# Altium PCB Karduino_PCB.pcbdoc
Units mil, origin at the board's own origin, x right, y up, seen from the top; angles counter-clockwise.
Board outline 4499.99 x 4624.99 mil, 2 copper layers (Top Layer, Bottom Layer); 38 components, 35 nets, 191 pads, 0 vias.
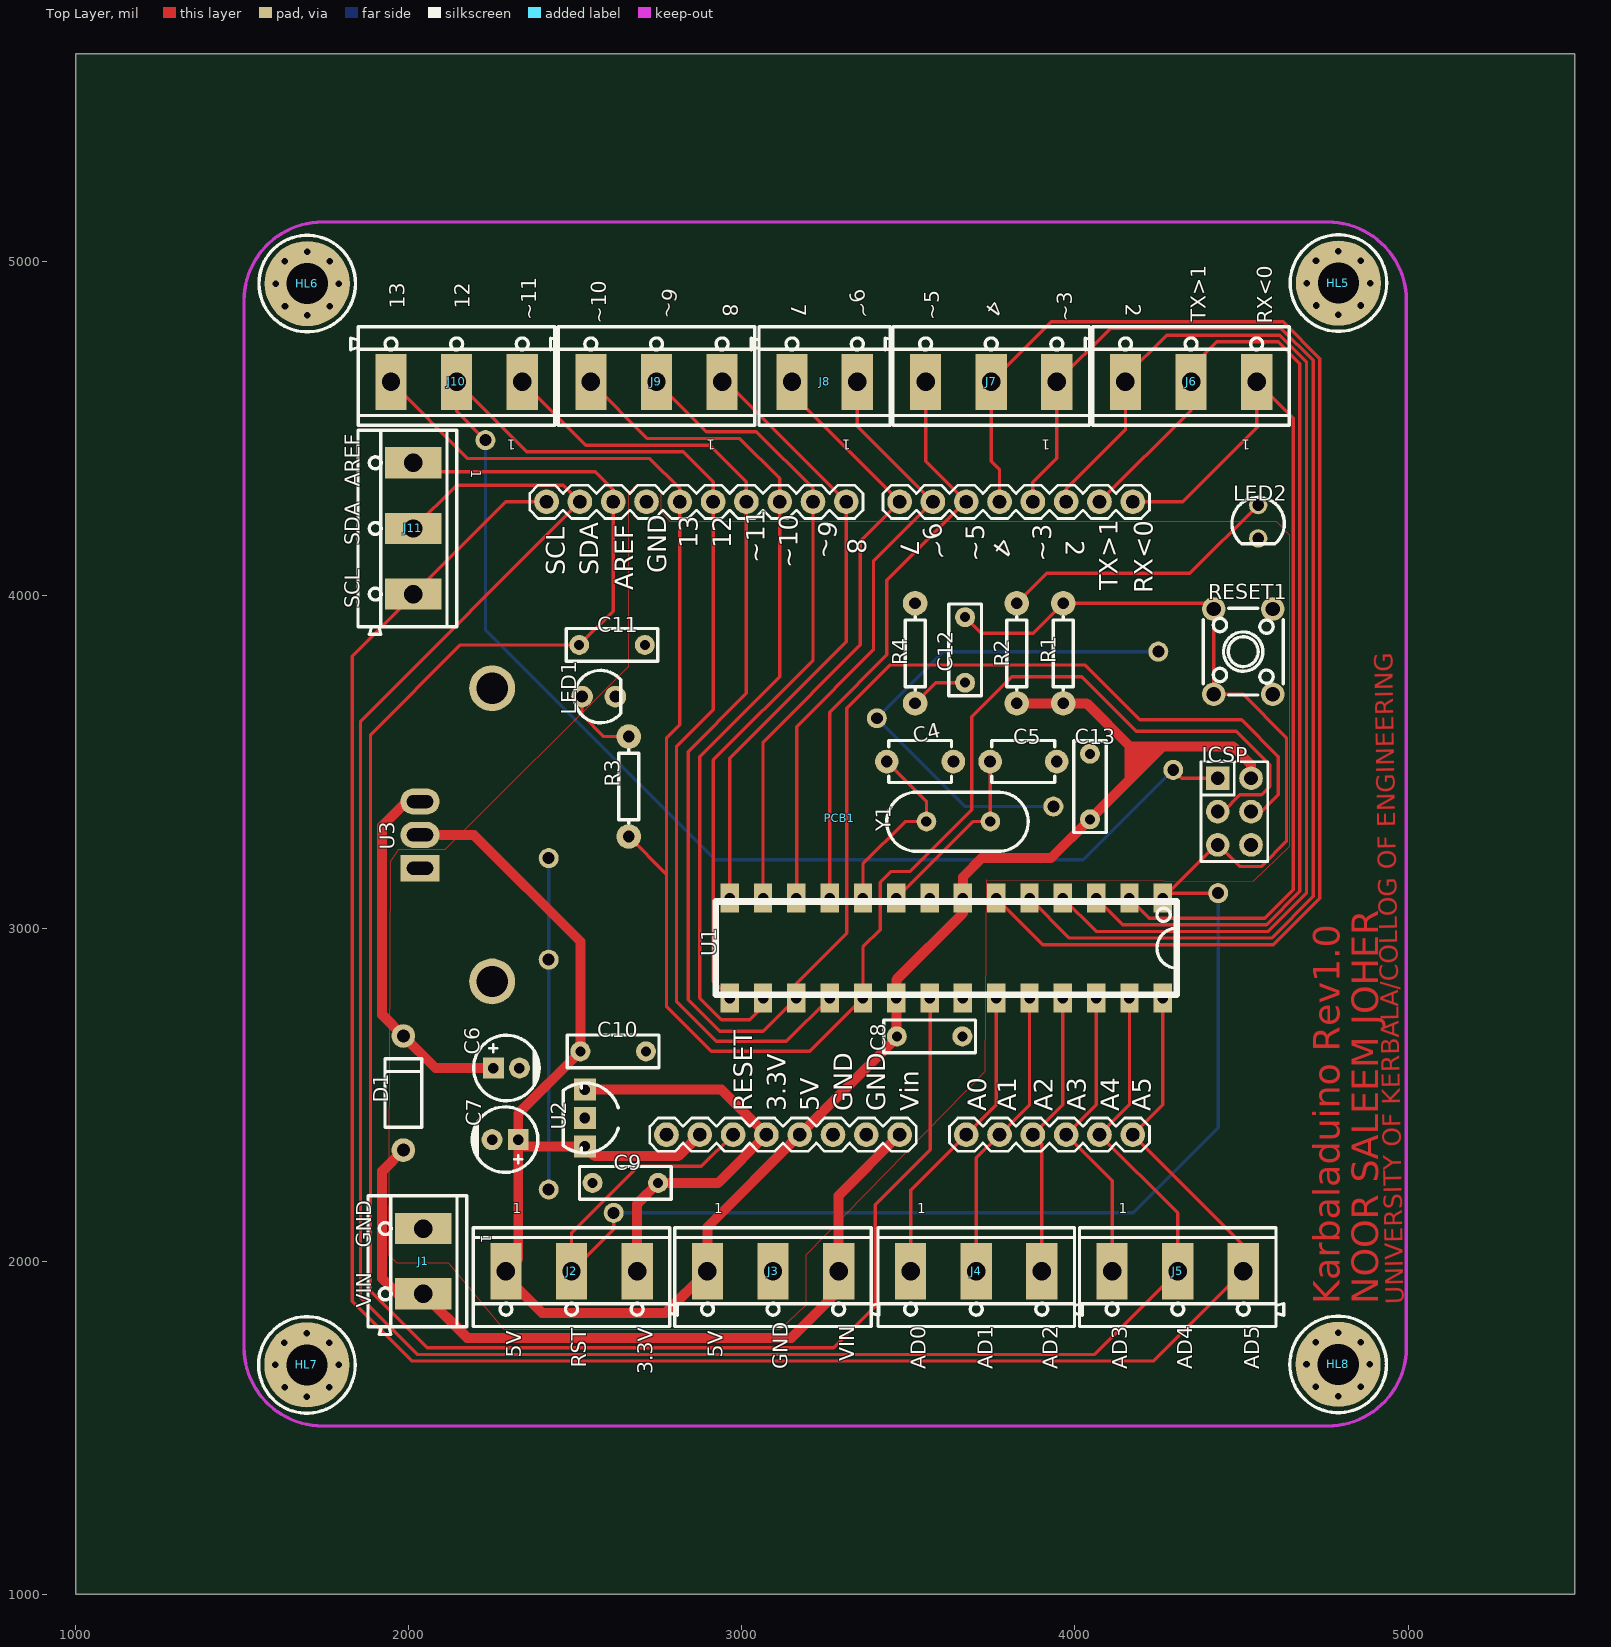
[diagram p0: Top Layer view]
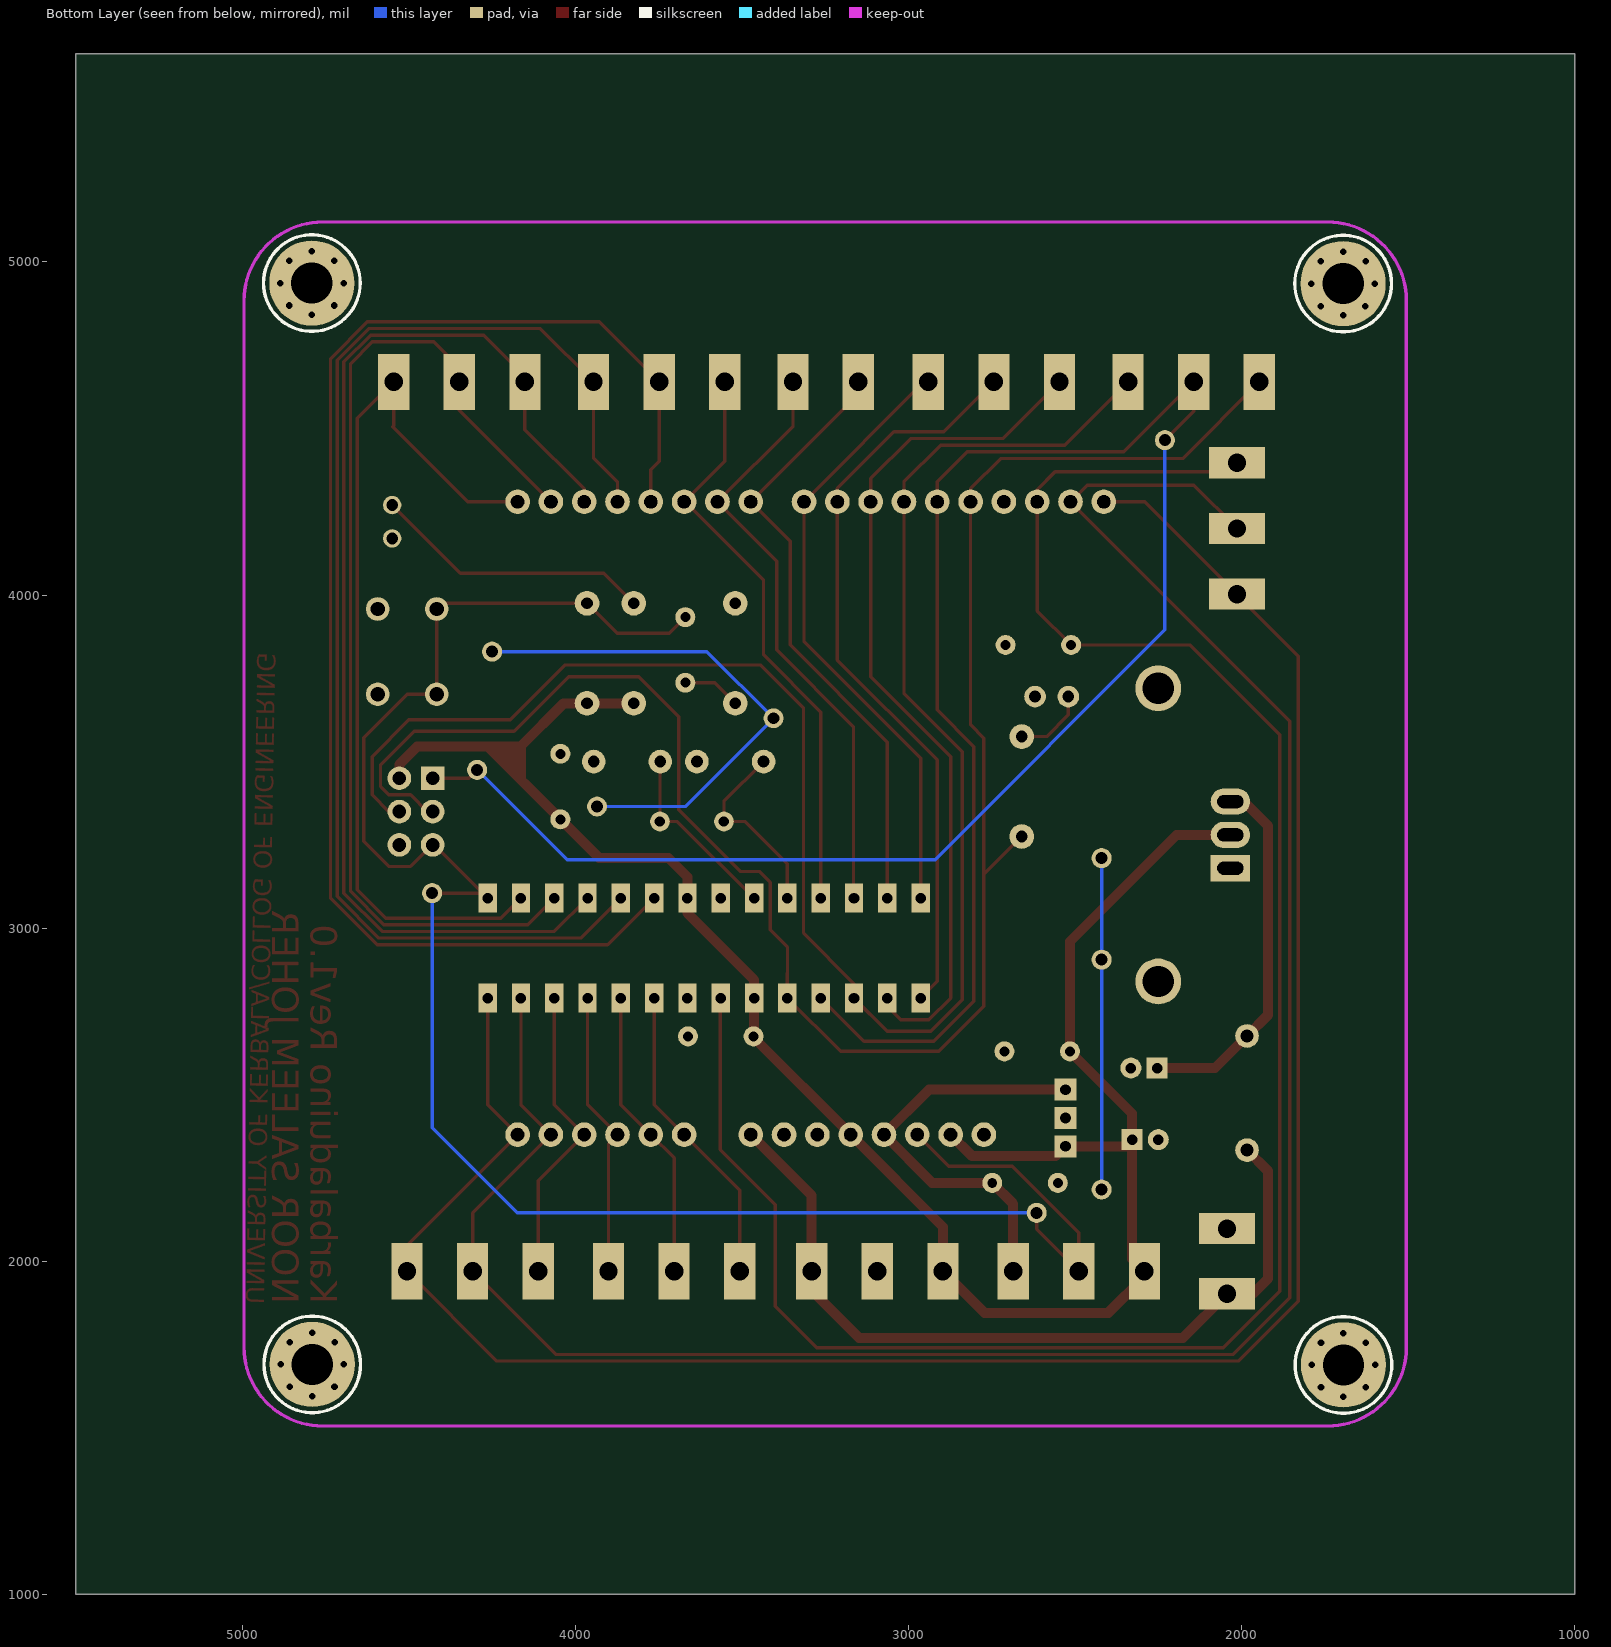
[diagram p1: Bottom Layer view, seen from below]

## Layer stack, top to bottom
Top Layer: signal copper (thickness not stored)
Dielectric: dielectric 12.6, FR-4, Dk 4.8
Bottom Layer: signal copper (thickness not stored)

## Board outline
5499.99,1000 1000,1000 1000,5624.99 5499.99,5624.99

## Components (designator, comment, footprint, x,y, rotation, side; value= is the part's Value field where it differs from the comment)
C4 "22pF" CAP-TH_L4.8-W3.2-P5.08-D0.5 3535.01,3500 r0 top
C5 "22pF" CAP-TH_L4.8-W3.2-P5.08-D0.5 3845.01,3500 r0 top
C6 "47uF" PKG-ELE-CAP-D5.0XH11.0XF2.0-VERT 2253.48,2579.84 r0 top
C7 "47uF" PKG-ELE-CAP-D5.0XH11.0XF2.0-VERT 2328.48,2364.84 r180 top
C8 "100nF" "100NF, 63V CAPACITOR" 3563.48,2674.84 r270 top
C9 "100nF" "100NF, 63V CAPACITOR" 2650.01,2235 r90 top
C10 "100nF" "100NF, 63V CAPACITOR" 2613.48,2629.84 r270 top
C11 "100nF" "100NF, 63V CAPACITOR" 2610.01,3850 r270 top
C12 "100nF" "100NF, 63V CAPACITOR" 3670.01,3835 r180 top
C13 "100nF" "100NF, 63V CAPACITOR" 4045.01,3425 r0 top
D1 "1N4007G-T" DO-41_BD2.4-L4.7-P8.70-D0.9-RD 1983.48,2504.84 r270 top
HL5 "M3 STUD" "M3 STUD" 4791.06,4936.53 r0 top
HL6 "M3 STUD" "M3 STUD" 1695.01,4935 r0 top
HL7 "M3 STUD" "M3 STUD" 1693.96,1688.47 r0 top
HL8 "M3 STUD" "M3 STUD" 4790.01,1690 r0 top
ICSP "ICSP" HDR-TH_6P-P2.54-V-M-R2-C3-S2.54-1 4478.51,3349.8 r270 top
J1 "CON_TERMINAL_BLOCK_02-5MM" TERMINAL_BLOCK_2P_5 2043.48,1999.84 r90 top
J2 "CON_TERMINAL_BLOCK_03-5MM" TERMINAL_BLOCK_3P_5 2488.48,1969.84 r180 top
J3 "CON_TERMINAL_BLOCK_03-5MM" TERMINAL_BLOCK_3P_5 3093.48,1969.84 r180 top
J4 "CON_TERMINAL_BLOCK_03-5MM" TERMINAL_BLOCK_3P_5 3703.48,1969.84 r180 top
J5 "CON_TERMINAL_BLOCK_03-5MM" TERMINAL_BLOCK_3P_5 4308.48,1969.84 r180 top
J6 "CON_TERMINAL_BLOCK_03-5MM" TERMINAL_BLOCK_3P_5 4348.48,4639.84 r0 top
J7 "CON_TERMINAL_BLOCK_03-5MM" TERMINAL_BLOCK_3P_5 3748.48,4639.84 r0 top
J8 "CON_TERMINAL_BLOCK_02-5MM" TERMINAL_BLOCK_2P_5 3248.48,4639.84 r0 top
J9 "CON_TERMINAL_BLOCK_03-5MM" TERMINAL_BLOCK_3P_5 2743.48,4639.84 r0 top
J10 "CON_TERMINAL_BLOCK_03-5MM" TERMINAL_BLOCK_3P_5 2143.51,4639.8 r0 top
J11 "CON_TERMINAL_BLOCK_03-5MM" TERMINAL_BLOCK_3P_5 2013.51,4199.8 r90 top
LED1 "LED-TH-3mm_G" LED-TH_BD3.0_GREEN 2570.01,3695 r90 top
LED2 "LED-TH-3mm_R" LED-TH_BD3.0_RED 4550.01,4220 r0 top
PCB1 "ARDUINO UNO SHIELD" E14_ARDUINO_SHIELD_PINOUT 3293.48,3329.84 r0 top
R1 "10k" R_AXIAL-0.3 3965.01,3825 r90 top
R2 "1K" R_AXIAL-0.3 3825.01,3825 r270 top
R3 "1K" R_AXIAL-0.3 2660.01,3425 r90 top
R4 "1K" R_AXIAL-0.3 3520.01,3825 r270 top
RESET1 "K4-6×6_TH" KEY-TH_4P-L6.0-W6.0-P4.50-LS6.5 4505.01,3830 r270 top
U1 "ATmega328-PU" DIP28 3613.48,2939.84 r180 top
U2 "LE33CZ" TO92-INLINE 2528.48,2429.84 r270 top
Y1 "16.000" CRYSTAL-TH_L10.8-W4.5-P4.88 3650.01,3320 r0 top

## Footprints (in the part's own frame and the unit in brackets; to place one, negate y for a bottom-side part, rotate by r counter-clockwise, add the part's x,y. Pads: shape width x height; smd on the part's side, far side on the other; paste and mask are expansions set on the pad)
"100NF, 63V CAPACITOR" [mil]
  round 60 hole 30 paste+0 mask+2: 1(0,98.4) 2(0,-98.4)
  silkscreen extent -49,-138 49,138
CAP-TH_L4.8-W3.2-P5.08-D0.5 [mm]
  round 1.8 hole 0.9 paste+0 mask+0.051: 1(-2.54,0) 2(2.54,0)
  silkscreen extent -2.4,-1.6 2.4,1.6
CRYSTAL-TH_L10.8-W4.5-P4.88 [mm]
  round 1.5 hole 0.8 paste+0 mask+0.051: 1(-2.44,0) 2(2.44,0)
  silkscreen extent -5.46,-2.28 5.32,2.24
DIP28 [mil]
  rect 55.1x86.6 hole 31.6 paste+0 mask+2: 1(-650,-150) 2(-550,-150) 3(-450,-150) 4(-350,-150) 5(-250,-150) 6(-150,-150) 7(-50,-150) 8(50,-150) 9(150,-150) 10(250,-150) 11(350,-150) 12(450,-150) 13(550,-150) 14(650,-150) 15(650,150) 16(550,150) 17(450,150) 18(350,150) 19(250,150) 20(150,150) 21(50,150) 22(-50,150) 23(-150,150) 24(-250,150) 25(-350,150) 26(-450,150) 27(-550,150) 28(-650,150)
  silkscreen extent -692,-140 692,140
DO-41_BD2.4-L4.7-P8.70-D0.9-RD [mm]
  round 1.8 hole 1 paste+0 mask+0.051: 1(-4.35,0) 2(4.35,0)
  silkscreen extent -2.6,-1.4 2.6,1.4
E14_ARDUINO_SHIELD_PINOUT [mil]
  round 74 hole 40 slot 40.2 at 90 deg paste+0 mask+2: 0(880,950) 1(780,950) 2(680,950) 3(580,950) 3.3V(-220,-950) 4(480,950) 5(380,950) 5V(-120,-950) 6(280,950) 7(180,950) 8(20,950) 9(-80,950) 10(-180,950) 11(-280,950) 12(-380,950) 13(-480,950) A0(380,-950) A1(480,-950) A2(580,-950) A3(680,-950) A4(780,-950) A5(880,-950) AREF(-680,950) GND(-580,950) GND.(80,-950) GND..(-20,-950) I/OREF(-420,-950) N/C(-520,-950) RESET(-320,-950) SCL(-880,950) SDA(-780,950) VIN(180,-950)
  silkscreen extent -930,-1000 930,1000
HDR-TH_6P-P2.54-V-M-R2-C3-S2.54-1 [mm]
  rect 1.8x1.8 hole 1.05 paste+0 mask+0.051: 1(-2.54,-1.27)
  round 1.8 hole 1.05 paste+0 mask+0.051: 2(-2.54,1.27) 3(0,-1.27) 4(0,1.27) 5(2.54,-1.27) 6(2.54,1.27)
  silkscreen extent -3.81,-2.54 3.81,2.54
KEY-TH_4P-L6.0-W6.0-P4.50-LS6.5 [mm]
  round 1.8 hole 1.1 paste+0 mask+0.051: 1(-3.251,-2.25) 2(3.251,-2.25) 3(3.251,2.25) 4(-3.251,2.25)
  silkscreen extent -3.3,-3.05 3.3,3.05
LED-TH_BD3.0_GREEN [mil]
  round 65 hole 35.43 paste+0 mask+2: 1(0,50) 2(0,-50)
  silkscreen extent -79,-66 79,73
LED-TH_BD3.0_RED [mm]
  round 1.4 hole 0.9 paste+0 mask+0.051: 1(0,1.27) 2(0,-1.27)
  silkscreen extent -2,-1.69 2,1.87
"M3 STUD" [mm]
  round 0.7 hole 0.5 paste+0: 1(-2.413,0) 1(-1.712,1.696) 1(-1.696,-1.712) 1(0,-2.413) 1(0,2.413) 1(1.712,-1.712) 1(1.712,1.696) 1(2.413,0)
  round 6.5 hole 3.15 paste+0 mask+0.102: 1(0,0)
  silkscreen extent -3.68,-3.68 3.68,3.68
PKG-ELE-CAP-D5.0XH11.0XF2.0-VERT [mm]
  rect 1.6x1.6 hole 0.8 paste+0 mask+0.102: 1(0,0)
  round 1.6 hole 0.8 paste+0 mask+0.102: 2(2,0)
  silkscreen extent -1.49,-2.5 3.51,2.5
R_AXIAL-0.3 [mil]
  round 74 hole 35.4 paste+0 mask+2: 1(-150,0) 2(150,0)
  silkscreen extent -110,-30 110,30
TERMINAL_BLOCK_2P_5 [mil]
  rect 93.7x168.7 hole 55.2 paste+0 mask+2: 1(98,0) 2(-98,0)
  silkscreen extent -220,-130 197,166
TERMINAL_BLOCK_3P_5 [mm]
  rect 2.38x4.285 hole 1.402 paste+0 mask+0.051: 1(5.004,0) 2(0,0) 3(-5.004,0)
  silkscreen extent -8.08,-3.3 7.49,4.22
TO92-INLINE [mil]
  rect 66x66 hole 32 paste+0 mask+2: 1(-85,0) 2(0,0) 3(85,0)
  silkscreen extent -105,-65 105,100

## Free pads (board coordinates)
  rect 118.11x78.74 hole 39.37 slot 78.74 at 0 deg paste+0 mask+2: 1(2033.47,3179.84)
  oval 118.11x78.74 hole 39.37 slot 78.74 at 0 deg paste+0 mask+2: 2(2033.47,3279.84) 3(2033.47,3379.84)
  round 137.79 hole 94.09 paste+0 mask+2: 4(2250.01,2839.68) 4(2250.01,3720)
  round 60 hole 36 paste+0 mask+2: 5(4430.01,3105) 6(2615.01,2145) 7(4295.01,3475) 8(2230.01,4465) 9(4250.01,3830) 10(3405.01,3630) 12(2420.01,3210) 13(2420.01,2905) 14(2420.01,2215) 16(3935.01,3365)

## Nets (pads, with @x,y where several pads share a name; then routed paths per layer and width w, separated by ;. In a path a pad name is that pad's centre, name@x,y a point inside that pad or via, vN(x,y) a via of type N, cw(c..) or ccw(c..) an arc to the next point about the centre after c; other vN are vias at no path point)
+3.3V: C9.2 J2.3 PCB1.3.3V U2.1 | length 1277.2
  Top Layer w30: U2.1 2938.48,2514.84 PCB1.3.3V 2928.64,2235 C9.2 2685.48,2172.07 J2.3
+5V: C7.1 C8.2 C10.2 C13.2 ICSP.2 J2.1 J3.1 pad.2 PCB1.5V PCB1.I/OREF R1.1 R2.2 U1.7 U1.20 U2.3 | length 7292.4
  Top Layer w10: J3.1 2896.47,2102.84 PCB1.5V 3465.08,2671.44 C8.2
  Top Layer w30: pad.2 2195.17,3279.84 2515.08,2959.93 C10.2 2328.48,2443.24 C7.1 ; J2.1 2328.48,2006.84 C7.1 ; J2.1 2291.51,1953.5 2400.01,1845 2771.61,1845 J3.1 ; U2.3 2558.31,2315 2808.61,2315 PCB1.I/OREF ; U2.3 2348.48,2344.84 C7.1 ; J3.1 2896.47,2102.84 PCB1.5V 3465.08,2671.44 C8.2 3463.48,2676.44 U1.20 3463.48,2844.84 3663.48,3044.84 U1.7 ; U1.7 3663.51,3153.5 3720.01,3210 3928.41,3210 ; R2.2 R1.1 4035.01,3675 4165.01,3545 4263.41,3545 ; 3922.11,3210 3928.41,3210 ; 4163.5,3480.94 4227.55,3545 4244.06,3545 ; 4163.61,3445.2 4163.31,3545 4195.71,3513.1 ; ICSP.2 4528.51,3491.5 4475.01,3545 4263.41,3545 ; 3928.41,3210 C13.2 4263.41,3545
AD0: J4.1 PCB1.A0 U1.23 | length 926.5
  Top Layer w10: J4.1 3506.47,2212.84 PCB1.A0 3763.48,2469.84 U1.23
AD1: J4.2 PCB1.A1 U1.24 | length 886.3
  Top Layer w10: J4.2 3703.48,2309.84 PCB1.A1 3863.48,2469.84 U1.24
AD2: J4.3 PCB1.A2 U1.25 | length 868.5
  Top Layer w10: J4.3 3900.48,2352.84 PCB1.A2 3963.48,2469.84 U1.25
AD3: J5.1 PCB1.A3 U1.26 | length 914.4
  Top Layer w10: U1.26 4063.48,2469.84 PCB1.A3 4111.47,2241.84 J5.1
AD4/SDA: J5.2 J11.2 PCB1.A4 PCB1.SDA U1.27 | length 6819.3
  Top Layer w10: J11.2 2143.61,4330 2463.31,4330 PCB1.SDA 1855.01,3621.4 1855.01,1890 2025.01,1720 4058.61,1720 J5.2 ; U1.27 4163.48,2469.84 PCB1.A4 4308.48,2144.84 J5.2
AD5/SCL: J5.3 J11.3 PCB1.A5 PCB1.SCL U1.28 | length 6570.2
  Top Layer w10: J11.3 2013.51,3999.8 1830.01,3816.4 1830.01,1880 2010.01,1700 4235.61,1700 J5.3 ; J11.3 2290.48,4279.84 PCB1.SCL ; U1.28 4263.48,2469.84 PCB1.A5 4505.48,2047.84 J5.3
AREF: C11.2 J11.1 PCB1.AREF U1.21 | length 6181.4
  Top Layer w10: J11.1 2040.31,4370 2560.01,4370 2613.51,4316.5 PCB1.AREF ; PCB1.AREF 2613.48,3951.87 C11.2 2155.01,3850 1885.01,3580 1885.01,1910 2035.01,1760 2055.01,1740 3275.01,1740 3400.01,1865 3400.01,2170 3565.01,2335 3565.01,2788.3 U1.21
DTR: C12.1 R4.2 | length 175.5
  Top Layer w10: R4.2 3581.61,3736.6 C12.1
GND: C4.2 C5.2 C6.2 C7.2 C8.1 C9.1 C10.1 C11.1 C13.1 ICSP.6 J1.1 J3.2 LED1.2 LED2.2 pad.1 pad.9 pad.10 pad.12 pad.13 pad.14 pad.16 PCB1.GND PCB1.GND. PCB1.GND.. R4.1 RESET1.3 RESET1.4 U1.8 U1.22 U2.2 | length 2562.6
  Bottom Layer w10: pad.14 pad.13 pad.12 ; pad.16 3670.01,3365 pad.10 3605.01,3830 pad.9
IO0: J6.1 PCB1.0 U1.2 | length 2726.1
  Top Layer w10: U1.2 4223.31,3030 4570.01,3030 4655.01,3115 4655.01,3695 4655.01,4530.3 J6.1 ; PCB1.0 4323.48,4279.84 4548.48,4504.84 4545.48,4507.84 J6.1
IO1: J6.2 PCB1.1 U1.3 | length 3173.7
  Top Layer w10: U1.3 4143.32,3010 4575.01,3010 4675.01,3110 4675.01,4695 4610.01,4760 4425.01,4760 4348.48,4683.47 J6.2 4348.48,4554.84 PCB1.1
IO2: J6.3 PCB1.2 U1.4 | length 3493.7
  Top Layer w10: U1.4 4063.32,2990 4580.01,2990 4695.01,3105 4695.01,4700 4615.01,4780 4275.01,4780 4151.48,4656.47 J6.3 ; PCB1.2 3973.51,4318.5 4151.51,4496.5 J6.3
IO3: J7.1 PCB1.3 U1.5 | length 3828
  Top Layer w10: U1.5 3983.32,2970 4590.01,2970 4715.01,3095 4715.01,4705 4620.01,4800 4105.64,4800 J7.1 ; PCB1.3 3873.51,4338.5 3945.51,4410.5 J7.1
IO4: J7.2 PCB1.4 U1.6 | length 4184.5
  Top Layer w10: J7.2 3748.51,4401.5 3773.51,4376.5 PCB1.4 ; J7.2 3928.64,4820 4625.01,4820 4735.01,4710 4735.01,3090 4595.01,2950 3903.32,2950 U1.6
IO5: J7.3 PCB1.5 U1.11 | length 1772.5
  Top Layer w10: U1.11 3263.51,3648.5 3435.01,3820 3435.01,4045 3669.81,4279.8 PCB1.5 ; J7.3 3551.47,4401.84 PCB1.5
IO6: J8.1 PCB1.6 U1.12 | length 1813.9
  Top Layer w10: U1.12 3165.01,3091.4 3165.01,3605 3395.01,3835 3395.01,4101.4 PCB1.6 ; J8.1 3346.47,4506.84 PCB1.6
IO7: J8.2 PCB1.7 U1.13 | length 1853.6
  Top Layer w10: U1.13 3063.51,3558.5 3355.01,3850 3355.01,4161.4 PCB1.7 ; J8.2 3150.48,4602.84 PCB1.7
IO8: J9.1 PCB1.8 U1.14 | length 1857.1
  Top Layer w10: J9.1 2953.48,4639.84 PCB1.8 3313.48,3859.84 2963.48,3509.84 U1.14
IO9: J9.2 PCB1.9 U1.15 | length 2277.5
  Top Layer w10: J9.2 2893.48,4489.84 3043.48,4489.84 3213.48,4319.84 PCB1.9 3213.48,3804.84 2913.48,3504.84 2913.48,2839.84 U1.15
LED2_1: LED2.1 R2.1 | length 847.2
  Top Layer w10: R2.1 3915.01,4065 4345.01,4065 LED2.1
MISO: ICSP.1 J10.2 pad.7 pad.8 PCB1.12 U1.18 | length 6450.6
  Top Layer w10: pad.8 2143.48,4551.53 J10.2 2353.48,4429.84 2823.48,4429.84 2913.48,4339.84 PCB1.12 2913.48,3654.84 2803.48,3544.84 2803.48,2779.84 2923.48,2659.84 3133.48,2659.84 U1.18 ; pad.7 4320.01,3450 ICSP.1
  Bottom Layer w10: pad.8 2230.01,3895 2920.01,3205 4025.01,3205 pad.7
MOSI: ICSP.4 J10.1 PCB1.11 U1.17 | length 5443.5
  Top Layer w10: J10.1 2530.48,4449.84 2903.48,4449.84 3013.48,4339.84 PCB1.11 3013.48,3704.84 2838.48,3529.84 2838.48,2784.84 2933.48,2689.84 3063.48,2689.84 U1.17 ; U1.17 3163.51,2833.5 3315.01,2985 3315.01,3660 3445.01,3790 4030.01,3790 4195.01,3625 4500.01,3625 4610.01,3515 4610.01,3400 4559.81,3349.8 ICSP.4
R3_2: LED1.1 R3.2 | length 221.9
  Top Layer w10: LED1.1 2520.01,3640 2585.01,3575 R3.2
RESET: C12.2 ICSP.5 J2.2 pad.5 pad.6 PCB1.RESET R1.2 RESET1.1 RESET1.2 U1.1 | length 5895
  Top Layer w10: J2.2 2488.51,2084.8 2688.61,2285 2878.61,2285 PCB1.RESET ; J2.2 2615.01,2096.37 pad.6 ; C12.2 3718.4,3885 3875.01,3885 R1.2 4399.41,3975 RESET1.1 RESET1.2 4504.7,3702 4635.01,3571.7 4635.01,3260 4560.01,3185 4495.01,3185 4430.17,3249.84 ICSP.5 4423.48,3249.84 U1.1 4278.64,3105 pad.5
  Bottom Layer w10: pad.6 4175.01,2145 4430.01,2400 pad.5
S$28: 
S$31: 
S$33: 
SCK: ICSP.3 J10.3 PCB1.13 R3.1 U1.19 | length 5763.5
  Top Layer w10: J10.3 2176.47,4409.84 2723.48,4409.84 2813.48,4319.84 PCB1.13 2813.48,3609.84 2773.48,3569.84 2773.48,2764.84 2908.48,2629.84 3203.48,2629.84 U1.19 ; R3.1 2773.51,3161.5 ; U1.19 3363.31,2943.4 3415.01,2995.1 3415.01,3136.9 3448.11,3170 3505.01,3170 3675.01,3340 3690.01,3355 3690.01,3635 3810.01,3755 4020.01,3755 4184.11,3590.9 4484.11,3590.9 ; ICSP.3 4444.81,3349.8 4495.01,3400 4560.01,3400 4585.01,3425 4585.01,3490 4485.01,3590
SS: J9.3 PCB1.10 U1.16 | length 2605
  Top Layer w10: J9.3 2716.47,4469.84 2993.48,4469.84 3113.48,4349.84 PCB1.10 3113.48,3754.84 2873.48,3514.84 2873.48,2789.84 2938.48,2724.84 3023.48,2724.84 3063.48,2764.84 U1.16
U3_3: C6.1 D1.1 pad.3 | length 1110.3
  Top Layer w30: pad.3 1993.51,3379.8 1920.01,3306.4 1920.01,2739.6 D1.1 2079.74,2579.84 C6.1
VIN: D1.2 J1.2 J3.3 PCB1.VIN | length 2944.2
  Top Layer w10: J3.3 3290.48,2196.84 PCB1.VIN
  Top Layer w30: D1.2@1983.51,2333.5 1920.01,2270.1 1920.01,1948.3 1966.51,1901.8 J1.2 2175.31,1770 3148.61,1770 3290.51,1911.8 J3.3 ; J3.3 3290.48,2196.84 PCB1.VIN
Y1_1: C4.1 U1.10 Y1.1 | length 575.8
  Top Layer w10: U1.10 3363.48,3193.47 3490.01,3320 Y1.1 3553.95,3381.06 C4.1
Y1_2: C5.1 U1.9 Y1.2 | length 558.4
  Top Layer w10: U1.9 3693.61,3320 Y1.2 ; C5.1 3746.07,3498.94 Y1.2
pads on no net: HL5.1 HL6.1 HL7.1 HL8.1 PCB1.N/C

## Polygon pours and split planes (outlines as drawn)
GND on Top Layer (solid): 4605.01,4220 2785.01,4220 2758.48,4249.84 2758.48,4309.84 2738.48,4329.84 2728.48,4329.84 2683.48,4329.84 2658.48,4304.84 2658.48,3784.84 2108.48,3234.84 1968.48,3234.84 1943.48,3199.84 1938.48,2019.84 1963.48,1994.84 1993.48,1994.84 2118.48,1994.84 2285.01,1795 3115.01,1795 3193.48,1869.84 3193.48,1874.84 3193.48,2019.84 3730.01,2570 3735.01,3145 4535.01,3140 4645.01,3245 4645.01,4180

## Keep-outs
Keep-Out Layer:
  lines w10: 1505,1741.22 ccw(c1741.22,1741.22) 1741.22,1505 ; 1505,4883.77 cw(c1741.22,4883.77) 1741.22,5119.99 ; 4758.77,1505 ccw(c4758.77,1741.22) 4994.99,1741.22 ; 4758.77,5119.99 cw(c4758.77,4883.77) 4994.99,4883.77

## Other copper
Top Layer:
  text "Karbaladuino Rev1.0" at 4795.01,1870 h80 r90
  text "NOOR SALEEM JOHER" at 4910.01,1870 h80 r90
  text "UNIVERSITY OF KERBALA/COLLOG OF ENGINEERING" at 4987.56,1870.48 h55.12 r91

## Silkscreen, mask and mechanical layers (free items; w line width, h text height)
Top Overlay:
  text "4" at 3751.8,4888.22 h45 r234
  text "8" at 2942.51,4875 h45 r270
  text "7" at 3147.51,4875 h45 r270
  text "2" at 4152.51,4875 h45 r270
  text "13" at 1987.51,4860 h45 r90
  text "12" at 2182.51,4860 h45 r90
  text "~6" at 3391.4,4836.95 h45 r108
  text "~9" at 2792.09,4825.71 h45 r79
  text "~11" at 2382.51,4825 h45 r90
  text "~5" at 3592.51,4825 h45 r90
  text "~3" at 3992.51,4820 h45 r90
  text "TX>1" at 4392.51,4820 h45 r90
  text "~10" at 2592.51,4815 h45 r90
  text "RX<0" at 4592.51,4815 h45 r90
  text "AREF" at 1852.51,4325 h45 r90
  text "SDA" at 1852.51,4150 h45 r90
  text "SCL" at 1852.51,3960 h45 r90
  text "U3" at 1957.51,3235 h45 r90
  text "GND" at 1887.51,2040 h45 r90
  text "VIN" at 1887.51,1860 h45 r90
  text "5V" at 2337.51,1710 h45 r90
  text "5V" at 2942.51,1710 h45 r90
  text "VIN" at 3337.51,1700 h45 r90
  text "RST" at 2532.51,1680 h45 r90
  text "GND" at 3137.51,1675 h45 r90
  text "AD0" at 3552.51,1675 h45 r90
  text "AD1" at 3752.51,1675 h45 r90
  text "AD2" at 3947.51,1675 h45 r90
  text "AD3" at 4157.51,1675 h45 r90
  text "AD4" at 4352.51,1675 h45 r90
  text "AD5" at 4552.51,1675 h45 r90
  text "3.3V" at 2732.51,1660 h45 r90

## Text inside footprints (layer, text, board x,y; h text height)
J1: Top Overlay "1" at 2217.48,2078.84 h30 r270
J2: Top Overlay "1" at 2311.48,2143.84 h30
J3: Top Overlay "1" at 2916.48,2143.84 h30
J4: Top Overlay "1" at 3526.48,2143.84 h30
J5: Top Overlay "1" at 4131.48,2143.84 h30
J6: Top Overlay "1" at 4525.48,4465.84 h30 r180
J7: Top Overlay "1" at 3925.48,4465.84 h30 r180
J8: Top Overlay "1" at 3327.48,4465.84 h30 r180
J9: Top Overlay "1" at 2920.48,4465.84 h30 r180
J10: Top Overlay "1" at 2320.51,4465.8 h30 r180
J11: Top Overlay "1" at 2187.51,4376.8 h30 r270
PCB1: Top Overlay "GND" at 2773.01,4065 h56 r90; Top Overlay "AREF" at 2673.01,4015 h56 r90; Top Overlay "A0" at 3733.01,2450 h56 r90; Top Overlay "A1" at 3823.01,2450 h56 r90; Top Overlay "A2" at 3933.01,2450 h56 r90; Top Overlay "A3" at 4033.01,2450 h56 r90; Top Overlay "A4" at 4133.01,2450 h56 r90; Top Overlay "A5" at 4228.01,2450 h56 r90; Top Overlay "RESET" at 3031,2450 h55.98 r90; Top Overlay "3.3V" at 3131,2450 h55.98 r90; Top Overlay "5V" at 3231,2450 h55.98 r90; Top Overlay "GND" at 3331,2450 h55.98 r90; Top Overlay "GND" at 3431,2450 h55.98 r90; Top Overlay "Vin" at 3531,2450 h55.98 r90; Top Overlay "RX<0" at 4233.01,4005 h56 r90; Top Overlay "TX>1" at 4128.01,4015 h56 r90; Top Overlay "2" at 3972.01,4165 h56 r270; Top Overlay "~3" at 3928.01,4100 h56 r90; Top Overlay "4" at 3777.35,4176.46 h56 r234; Top Overlay "~5" at 3728.01,4100 h56 r90; Top Overlay "~6" at 3626.64,4113.65 h56 r108; Top Overlay "7" at 3477.01,4165 h56 r270; Top Overlay "8" at 3317.01,4170 h56 r270; Top Overlay "~9" at 3267.49,4104.66 h56 r79; Top Overlay "~10" at 3168.01,4080 h56 r90; Top Overlay "~11" at 3068.01,4095 h56 r90; Top Overlay "12" at 2968.01,4140 h56 r90; Top Overlay "13" at 2868.01,4140 h56 r90; Top Overlay "SDA" at 2568.01,4060 h56 r90; Top Overlay "SCL" at 2468.01,4060 h56 r90